# EAGLE board Board_7600 (EAGLE 9.6.2)
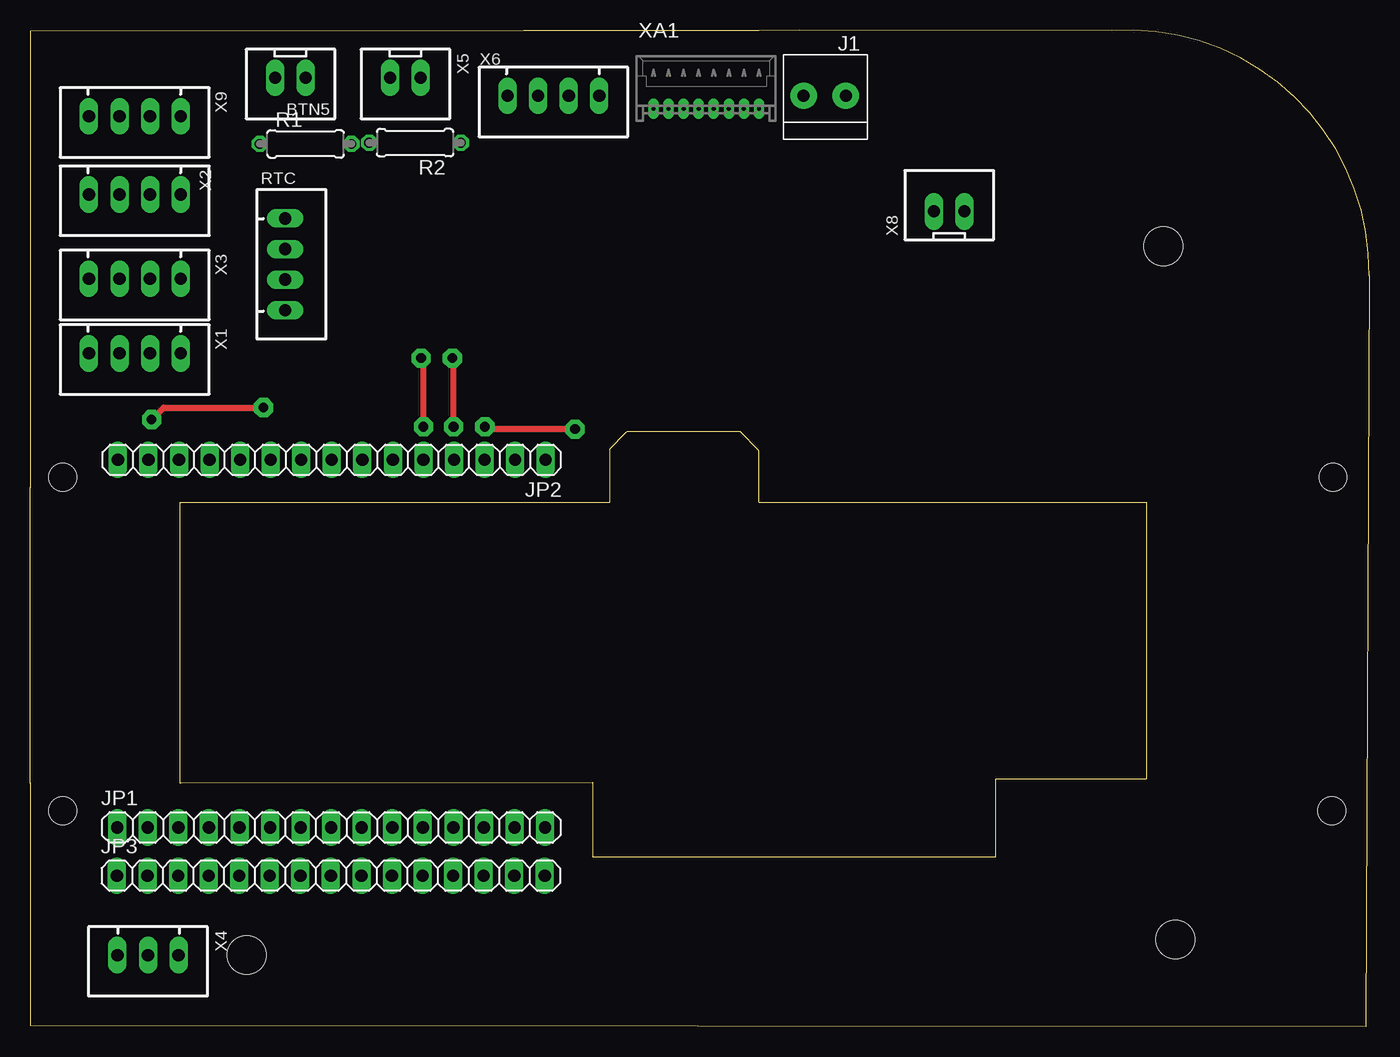
[diagram p0: board, top side]
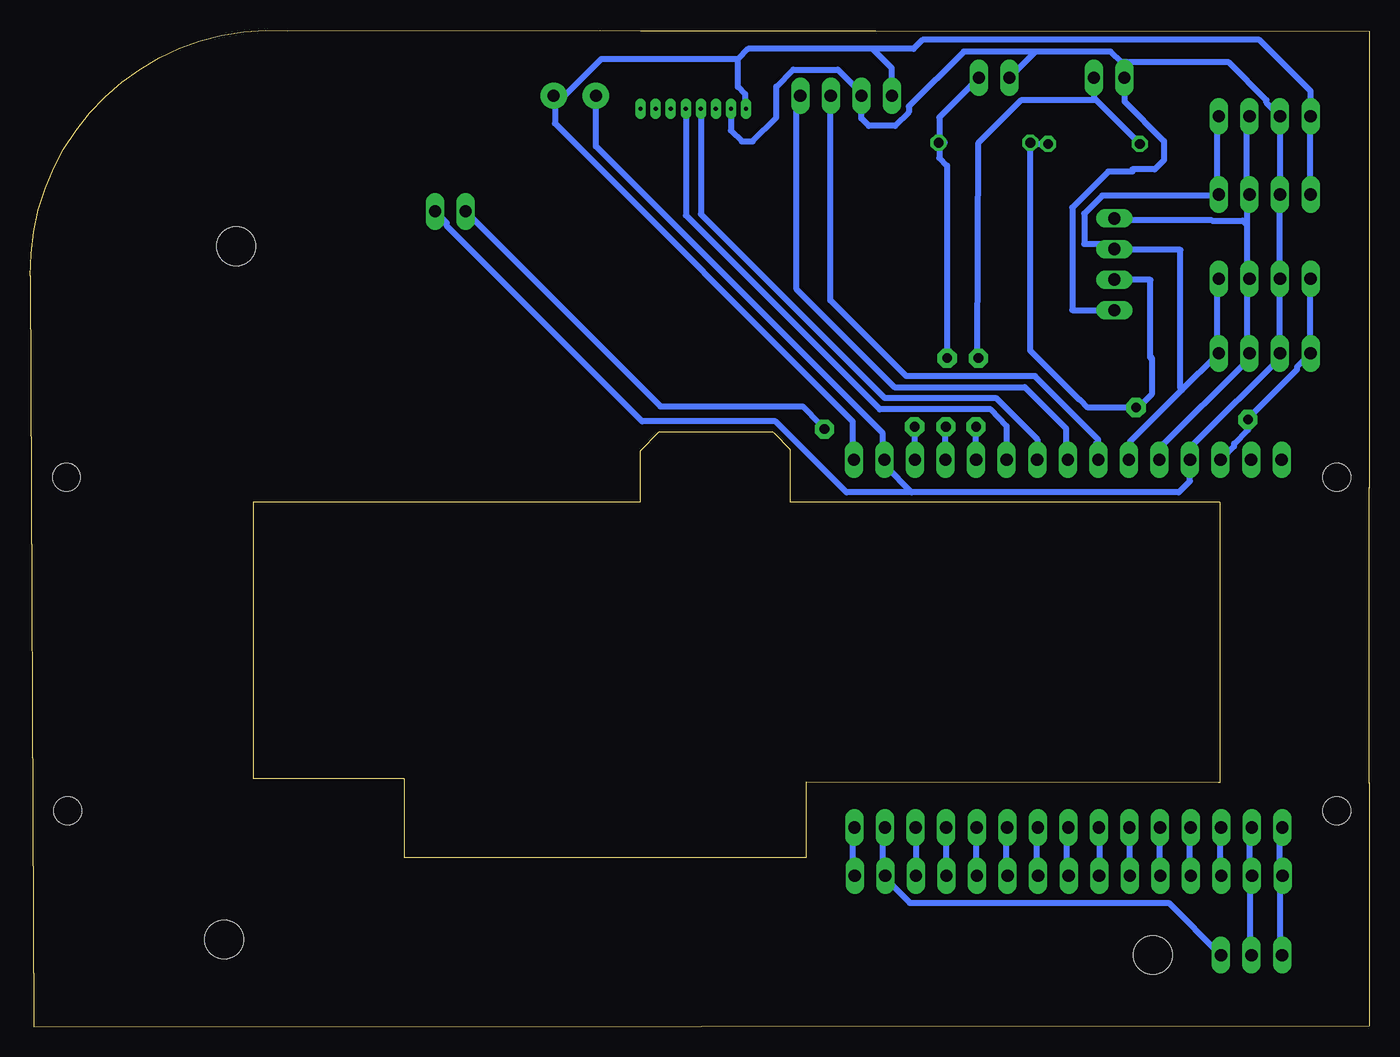
[diagram p1: board, bottom side, seen from below]

Size 111.32 x 82.81 mm. Coordinates in mm from the lower left corner, seen from the top.
Outline: 0,20.29 0,0.09 111.02,0 111.32,62.41 111.22,64.23 arc90 89.9,82.75 63.96,82.81 60.57,82.76 49.57,82.76 41,82.75 0,82.71 0,44.77
Outline: 0,20.23 0,44.82
Outline: 92.79,43.59 92.79,20.59 80.24,20.59 80.24,14.08 46.81,14.08 46.81,20.3 12.56,20.29 12.45,20.29 12.43,43.56 48.15,43.59 48.15,48 49.5,49.35 49.6,49.42 59.03,49.42 60.6,47.85 60.6,43.59 92.79,43.59
Copper layers (1*16): Top 0.035mm / dielectric 1.5mm / Bottom 0.035mm
Design rules "default *": minimum track width 0.5mm, minimum drill 0.35mm, track to track 0.4mm, track to pad 0.4mm, pad to pad 0.4mm, via to via 0.4mm, smd to smd 6mil, copper to edge 0.4mm, drill to drill 6mil, minimum pad ring 10mil, minimum via ring 8mil, stop-mask expansion 4mil, vias tented up to drill 0mil, thermal gap 10mil
Holes 2.3 mm at 2.7,45.65 108.3,45.65 108.2,17.95 2.7,17.95
Holes 3.2 mm at 94.2,64.85 95.2,7.25 18,5.95

## Footprints (pad centres in the part's own frame; a part is rotated, then mirrored left to right if it is on the bottom)
JST-XH-02-PACKAGE-LONG-PAD = drill 1.016 long: 1 -1.27,0; 2 1.27,0
1X2-3.5MM = drill 1 pad 2.184: 1 1.8,0; 2 -1.7,0
1X15 = drill 1.016 long: 1 -17.78,0; 2 -15.24,0; 3 -12.7,0; 4 -10.16,0; 5 -7.62,0; 6 -5.08,0; 7 -2.54,0; 8 0,0; 9 2.54,0; 10 5.08,0; 11 7.62,0; 12 10.16,0; 13 12.7,0; 14 15.24,0; 15 17.78,0
0207/7 = drill 0.813 octagon: 1 -3.81,0; 2 3.81,0
JST-XH-04-PACKAGE-LONG-PAD = drill 1.016 long: 1 -3.81,0; 2 -1.27,0; 3 1.27,0; 4 3.81,0
JST-XH-03-PACKAGE-LONG-PAD = drill 1.016 long: 1 -2.54,0; 2 0,0; 3 2.54,0
MOLEX_53048-0810 = drill 0.35 pad 0.597 long: 1 4.375,0.02; 2 3.125,0.02; 3 1.875,0.02; 4 0.625,0.02; 5 -0.625,0.02; 6 -1.875,0.02; 7 -3.125,0.02; 8 -4.375,0.02

## Placement (x,y rotation side)
BTN5  JST-XH-02-PIN-LONG-PAD  [JST-XH-02-PACKAGE-LONG-PAD]  21.64,78.85 180 top
J1  1X2-3.5MM  [1X2-3.5MM]  66,77.35 0 top
JP1  [1X15]  25.02,16.56 0 top
JP2  [1X15]  25.08,47.1 180 top
JP3  [1X15]  25,12.55 0 top
R1  [0207/7]  22.9,73.35 0 top
R2  [0207/7]  32,73.45 180 top
RTC  JST-XH-04-PIN-LONG-PAD  [JST-XH-04-PACKAGE-LONG-PAD]  21.2,63.35 270 top
X1  JST-XH-04-PIN-LONG-PAD  [JST-XH-04-PACKAGE-LONG-PAD]  8.7,55.95 180 top
X2  JST-XH-04-PIN-LONG-PAD  [JST-XH-04-PACKAGE-LONG-PAD]  8.7,69.15 180 top
X3  JST-XH-04-PIN-LONG-PAD  [JST-XH-04-PACKAGE-LONG-PAD]  8.7,62.15 180 top
X4  JST-XH-03-PIN-LONG-PAD  [JST-XH-03-PACKAGE-LONG-PAD]  9.8,5.95 180 top
X5  btn0  [JST-XH-02-PACKAGE-LONG-PAD]  31.2,78.85 180 top
X6  JST-XH-04-PIN-LONG-PAD  [JST-XH-04-PACKAGE-LONG-PAD]  43.5,77.35 180 top
X8  JST-XH-02-PIN-LONG-PAD  [JST-XH-02-PACKAGE-LONG-PAD]  76.4,67.75 0 top
X9  JST-XH-04-PIN-LONG-PAD  [JST-XH-04-PACKAGE-LONG-PAD]  8.7,75.65 180 top
XA1  53048-0810  [MOLEX_53048-0810]  56.2,76.25 0 top

## Library data of the parts
BTN5 RTC X1-X6 X8 X9 = Rembrandt Electronics - JST XH Connectors v1-0
J1 = adafruit
JP1-JP3 = pinhead
R1 R2 = rcl; SPICEPREFIX: R
XA1 = ConectorPlantower; AVAILABILITY: In Stock; CHECK_PRICES: https://www.snapeda.com/parts/53048-0810/Molex/view-part/?ref=eda; DESCRIPTION: 8 way through board PCB 90deg header | Molex Incorporated 53048-0810; MF: Molex; MP: 53048-0810; PACKAGE: None; PRICE: None; PURCHASE-URL: https://www.snapeda.com/api/url_track_click_mouser/?unipart_id=53851&manufacturer=Molex&part_name=53048-0810&search_term=picoblade 1.25mm header rightangle 8way; SNAPEDA_LINK: https://www.snapeda.com/parts/53048-0810/Molex/view-part/?ref=snap

## Nets
0: JP2.4 R2.1 X5.1
2: JP1.10 JP3.10
3V3: JP2.13 R1.2 R2.2 RTC.3 X1.4 X3.4
3V3B: JP1.1 JP3.1 X4.3
4: JP1.9 JP3.9
13: JP1.13 JP3.13
14: JP1.12 JP3.12
15: JP1.11 JP3.11
25: JP1.6 JP3.6
26: JP1.7 JP3.7
27: JP1.8 JP3.8
32: JP1.3 JP3.3
33: JP1.4 JP3.4
34: JP1.5 JP3.5
BTN: BTN5.1 JP2.5 R1.1
GND: BTN5.2 J1.2 JP2.2 JP2.12 RTC.4 X1.3 X2.3 X3.3 X5.2 X6.3 X8.2 X9.3 XA1.7
GND2: JP1.2 JP3.2 X4.2
N$6: XA1.3
N$7: XA1.2
N$8: XA1.1
RGB: JP1.14 JP3.14 X4.1
RST: JP2.3 X8.1
RX0: JP2.14
RX1: JP2.9 X6.2
RX2: JP2.7 XA1.5
SCL: JP2.11 RTC.1 X1.2 X2.2 X3.2 X9.2
SDA: JP2.10 RTC.2 X1.1 X2.1 X3.1 X9.1
SET: XA1.6
TX0: JP2.15
TX1: JP2.8 X6.1
TX2: JP2.6 XA1.4
VBAT: JP1.15 JP3.15
VBUS: J1.1 JP2.1 X2.4 X6.4 X9.4 XA1.8

## Tracks (layer width: path | path; a pad name or v marks a point on that pad's centre or on a via)
0  (via drill 0.8 pad 1.6)
  Top 0.5: v35.2,49.85 35.2,55.45 v35.1,55.55
  Bottom 0.5: 35.31,73.45 R2.1 35.76,73.39 | v35.1,55.55 35.1,71.54 35.76,72.2 35.76,73.39 | JP2.4 35.23,49.81 v35.2,49.85 | X5.1 35.76,75.56 35.76,73.39
2
  Bottom 0.5: JP3.10 30.2,12.55 30.2,16.55 JP1.10
3V3  (via drill 0.8 pad 1.6)
  Top 0.5: v10.1,50.45 11.1,51.45 v19.4,51.45
  Bottom 0.5: X1.4 4.95,56.05 4.95,62.05 5.1,62.15 X3.4 | 12.2,48.3 12.2,47.3 JP2.13 11.25,48.23 11.25,48.45 10.1,49.6 v10.1,50.45 10.1,50.52 6.02,54.6 6.02,54.82 X1.4 | 4.7,55.8 X1.4 | 18.1,55.6 18.1,55.55 | 18.1,55.55 18.1,52.55 19.2,51.45 v19.4,51.45 23.4,51.45 24.08,52.13 24.15,52.13 28.19,56.17 R2.2 28.09,73.35 R1.2 | RTC.3 21.2,62.05 18.2,62.05 18.2,55.55 18.1,55.55
3V3B
  Bottom 0.5: 7.45,12.55 7.45,16.55 JP1.1 | 7.45,12.55 JP3.1 | 7.45,12.55 7.45,6.14 X4.3
4
  Bottom 0.5: JP3.9 27.7,12.55 27.7,16.55 JP1.9
13
  Bottom 0.5: JP3.13 37.7,16.55 JP1.13
14
  Bottom 0.5: JP3.12 35.2,12.55 35.2,16.55 JP1.12
15
  Bottom 0.5: JP3.11 32.7,12.55 32.7,16.55 JP1.11
25
  Bottom 0.5: JP3.6 19.95,12.55 JP1.6
26
  Bottom 0.5: JP3.7 22.45,16.55 JP1.7
27
  Bottom 0.5: JP3.8 25.2,12.55 25.2,16.55 JP1.8
32
  Bottom 0.5: JP3.3 12.45,12.55 12.45,16.55 JP1.3
33
  Bottom 0.5: JP3.4 14.95,12.55 14.95,16.55 JP1.4
34
  Bottom 0.5: JP3.5 17.45,12.55 17.45,16.55 JP1.5
BTN  (via drill 0.8 pad 1.6)
  Top 0.5: v32.7,49.85 32.7,55.35 v32.5,55.55
  Bottom 0.5: JP2.5 v32.7,49.84 v32.7,49.85 | BTN5.1 22.91,77.17 R1.1 22.7,76.96 28.99,76.96 32.49,73.46 32.6,55.75 v32.5,55.55 32.3,55.55 32.3,55.75
GND
  Bottom 0.5: 38.05,44.4 40.2,46.55 40.2,47.05 JP2.2 40.45,47.24 40.45,49.3 64.3,73.15 J1.2 | 38.05,44.4 15.85,44.4 14.91,45.34 JP2.12 14.7,47.3 14.7,48.3 7.2,55.8 X1.3 7.45,56.05 7.45,62.05 X3.3 7.45,62.3 7.45,69.05 X2.3 7.45,69.3 7.45,75.55 X9.3 8.56,76.78 8.56,77 11.69,80.12 20.63,80.12 | 38.05,44.4 43.45,44.4 49.35,50.3 60.45,50.3 76.7,66.55 76.7,66.8 77.45,67.55 X8.2 77.45,67.8 | XA1.7 53.25,76.44 | XA1.7 52.9,76.1 | 20.63,80.12 21.52,81.02 27.76,81.02 | 20.63,80.12 20.37,79.87 BTN5.2 20.37,76.88 17.08,73.59 17.08,72.01 17.85,71.24 19.7,71.24 | X5.2 27.76,81.02 | XA1.7 53.08,74.47 52.17,73.56 51.28,73.56 49.3,75.54 49.3,78.12 47.9,79.52 44.19,79.52 42.23,77.57 X6.3 42.23,75.48 41.6,74.85 39.43,74.85 38.28,76 38.28,76.47 33.73,81.02 27.76,81.02 | 19.7,71.24 19.71,71.24 | RTC.4 24.7,59.55 24.7,68.05 21.7,71.05 19.7,71.05 19.7,71.24
GND2
  Bottom 0.5: 9.95,12.55 9.95,16.55 JP1.2 | 9.95,12.55 JP3.2 | 9.95,12.55 9.95,6.1 X4.2
RGB
  Bottom 0.5: JP1.14 40.45,16.55 40.45,12.55 JP3.14 40.2,12.51 40.2,12.29 38.21,10.3 16.69,10.3 X4.1
RST  (via drill 0.8 pad 1.6)
  Top 0.5: v45.3,49.65 38,49.65 v37.8,49.85
  Bottom 0.5: X8.1 58.93,51.55 47.1,51.55 45.65,50.1 | JP2.3 37.78,49.83 v37.8,49.85 | 45.65,50.1 45.4,49.85 | v45.3,49.65 45.7,50.05 45.65,50.1
RX1
  Bottom 0.5: 22.7,48.46 22.7,47.3 JP2.9 22.54,48.78 27.8,54.05 38.5,54.05 44.8,60.35 44.8,77.32 X6.2
RX2
  Bottom 0.5: XA1.5 55.58,67.53 40.3,52.25 31.06,52.25 27.61,48.8 JP2.7
SCL
  Bottom 0.5: JP2.11 17.45,47.3 17.45,48.05 10.2,55.3 10.2,55.8 X1.2 10.2,56.05 10.2,62.05 X3.2 10.2,62.3 10.2,66.65 | 10.2,68.55 10.2,69.05 X2.2 | X9.2 10.2,75.55 10.2,69.3 X2.2 | 10.2,66.65 10.2,68.3 X2.2 | RTC.1 21.2,67.05 13.17,67.05 13.09,66.98 10.53,66.98 10.2,66.65
SDA
  Bottom 0.5: X2.1 12.7,69.3 12.7,75.55 X9.1 | 12.7,61.3 12.7,62.05 X3.1 12.7,61.3 | 12.7,61.3 12.7,56.05 X1.1 12.7,55.8 15.57,52.92 | 15.57,52.92 19.95,48.55 19.95,47.3 JP2.10 | 21.15,64.6 RTC.2 | 12.95,69.3 X2.1 | 21.4,64.6 RTC.2 | RTC.2 21.2,64.55 15.7,64.55 15.7,53.05 15.57,52.92 | RTC.2 21.2,65.05 23.7,65.05 23.7,67.55 22.2,69.05 12.7,69.05 X2.1
TX1
  Bottom 0.5: JP2.8 25.2,47.3 25.2,49.7 28.65,53.15 39.5,53.15 47.61,61.26 47.61,77.05 X6.1
TX2
  Bottom 0.5: XA1.4 56.83,67.42 40.7,51.3 31.47,51.3 30.15,49.92 JP2.6
VBAT
  Bottom 0.5: JP3.15 42.95,12.55 42.95,16.55 JP1.15
VBUS
  Bottom 0.5: X2.4 4.95,69.3 4.95,75.55 X9.4 | 4.95,75.8 X9.4 | 52.5,80.4 52.5,78.1 51.9,77.5 51.9,76.34 XA1.8 | 52.5,80.4 63.85,80.4 66.95,77.3 67.45,77.3 J1.1 67.7,77.25 67.7,75.05 42.95,50.3 42.95,47.2 JP2.1 | 5.1,75.65 X9.4 | X6.4 39.69,79.64 41.3,81.25 | 52.5,80.4 51.65,81.25 41.3,81.25 | 41.3,81.25 37.9,81.25 37.15,82 9.15,82 4.89,77.74 X9.4